# Altium PCB 23cm_amplifier_pcb.PcbDoc
Units mm, origin at the board's own origin, x right, y up, seen from the top; angles counter-clockwise.
Board outline 50 x 50 mm, 4 copper layers (Top Layer, GND, VCC, Bottom Layer), stack 1.071 mm thick; 20 components, 10 nets, 64 pads, 352 vias.
Unrouted connection lines stored in the file: 39.
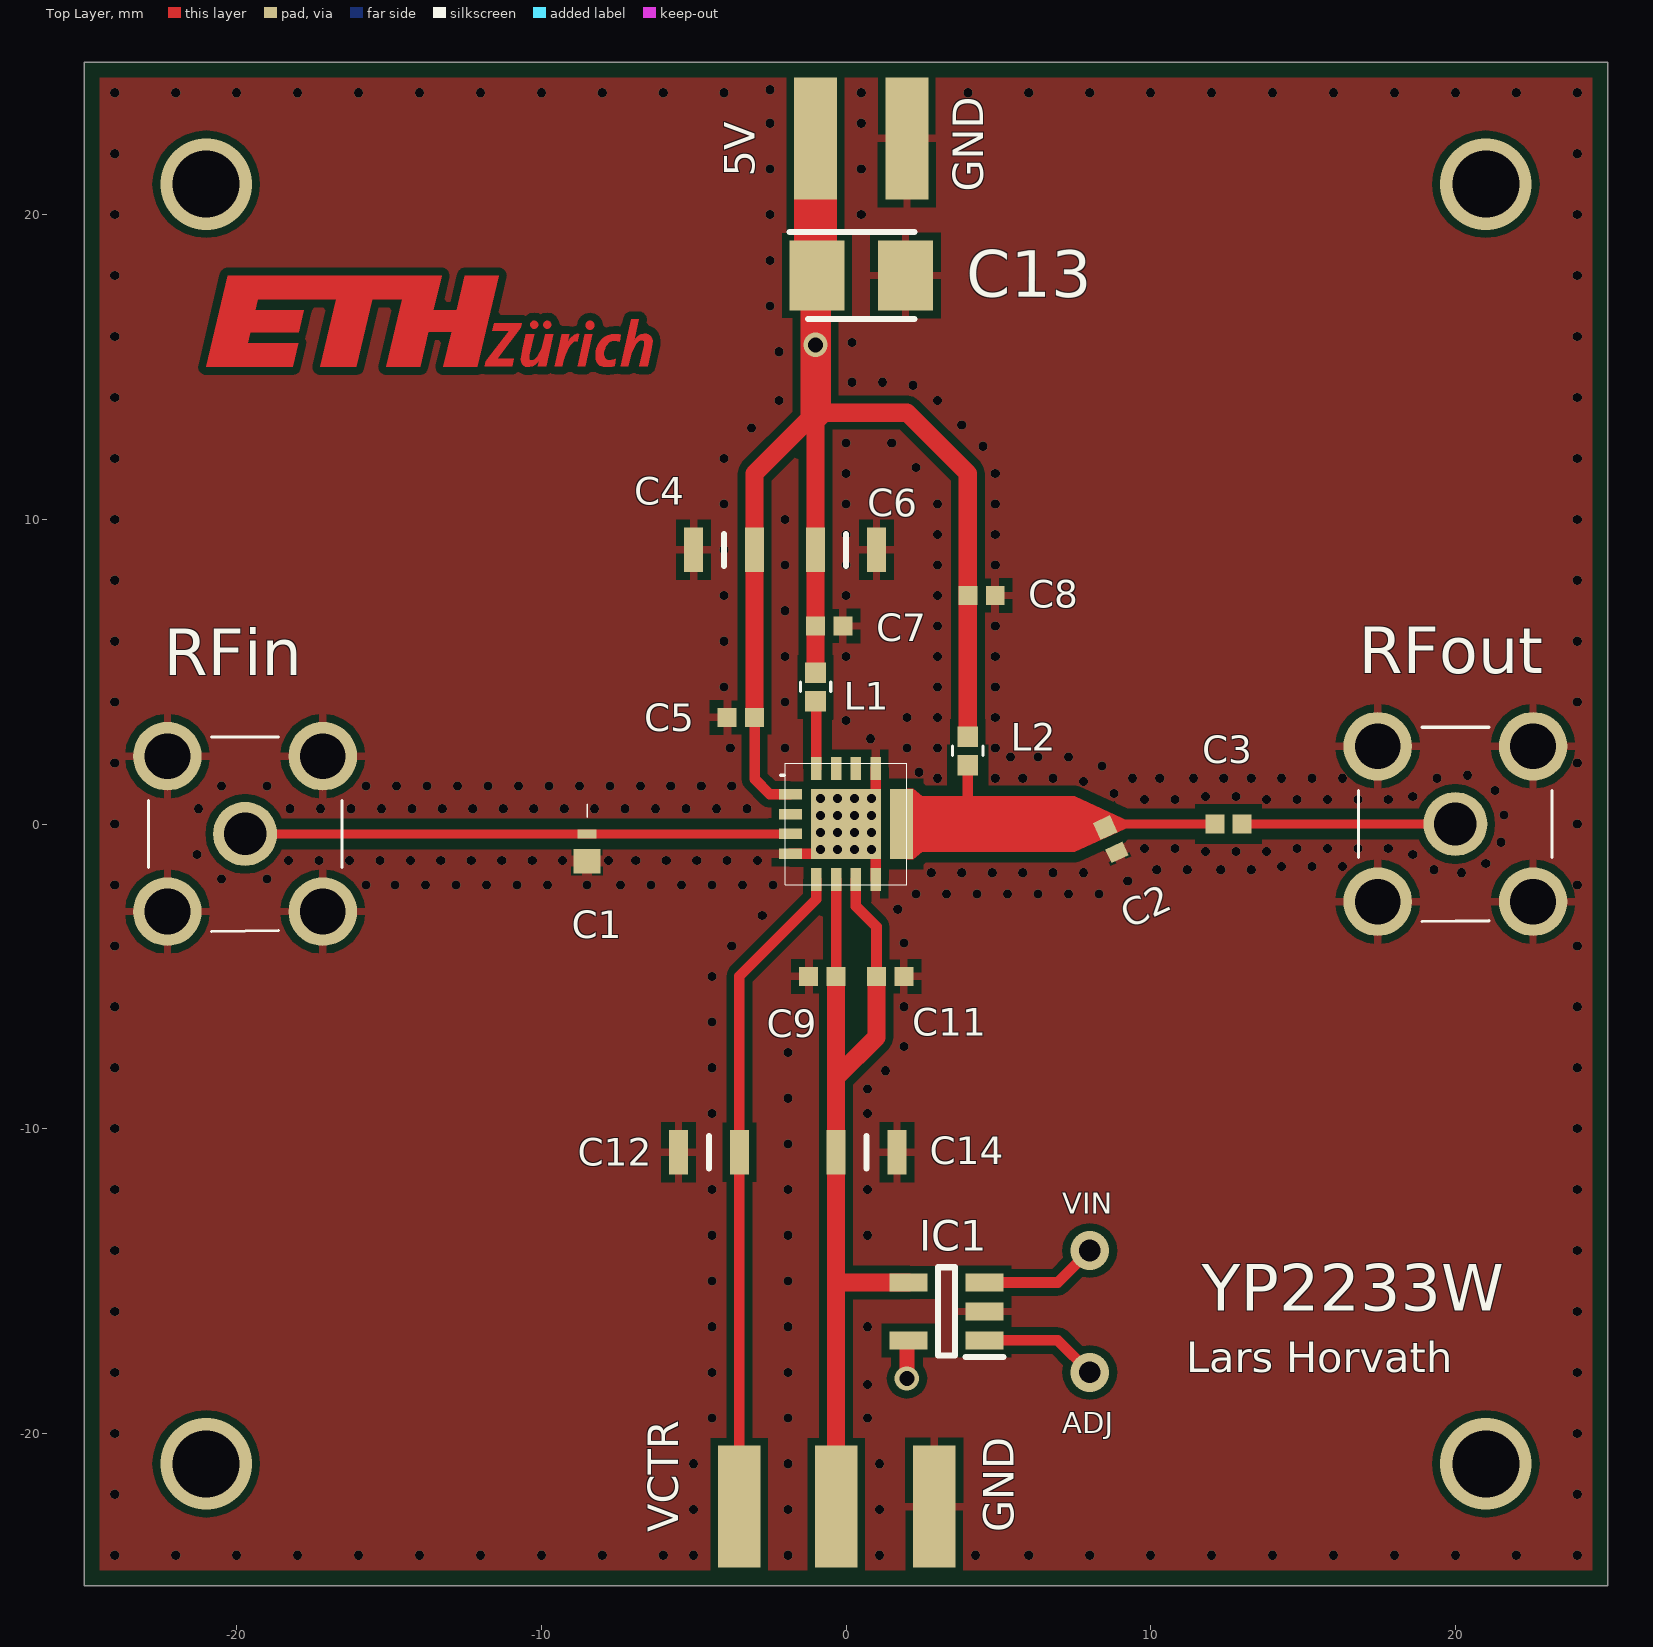
[diagram p0: Top Layer view]
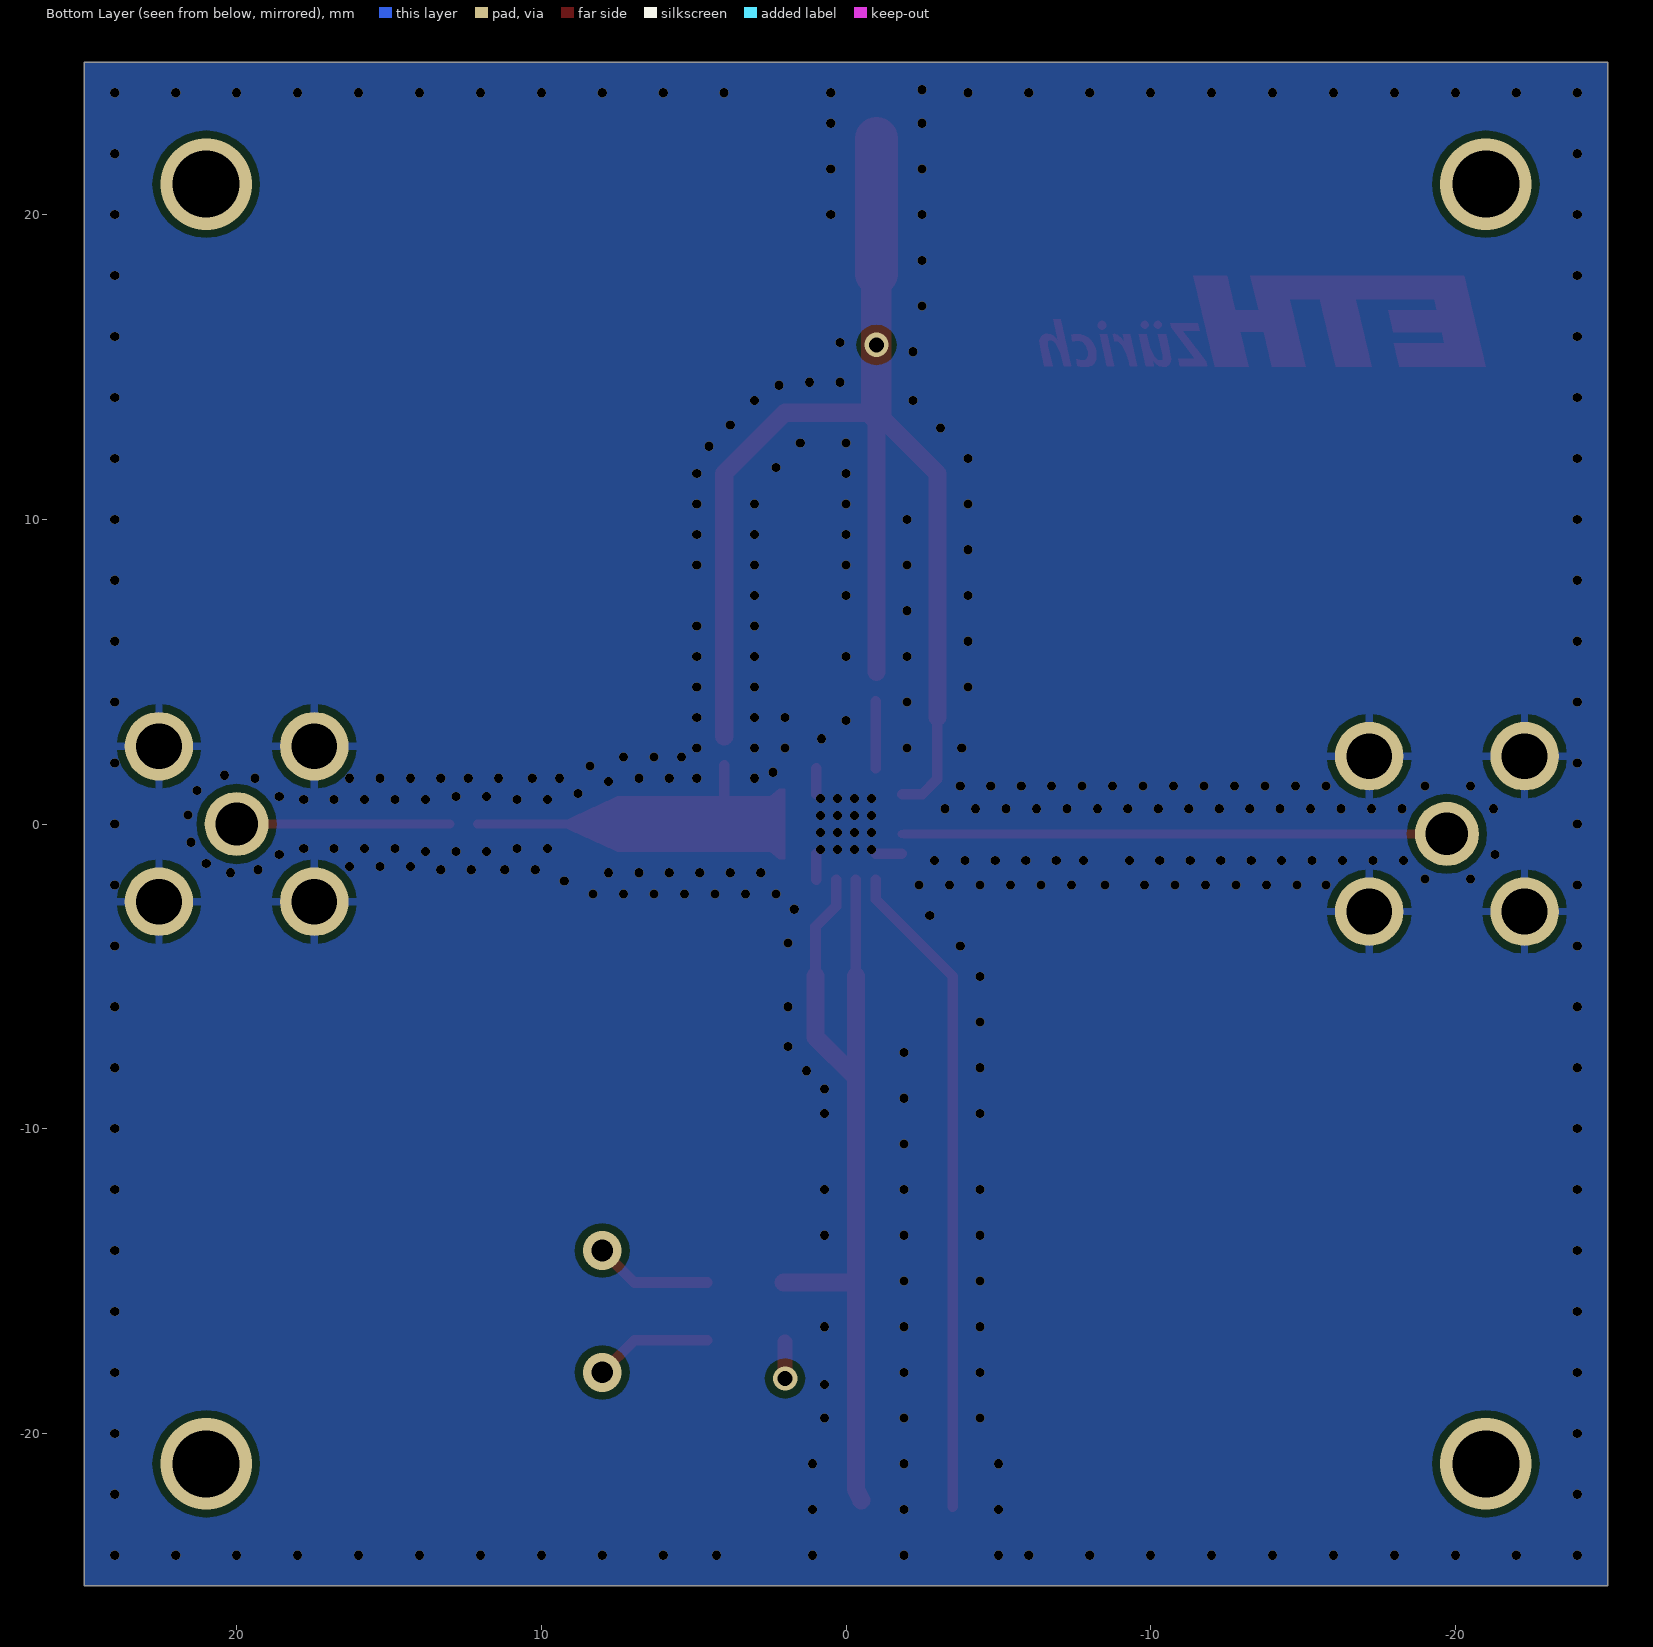
[diagram p1: Bottom Layer view, seen from below]
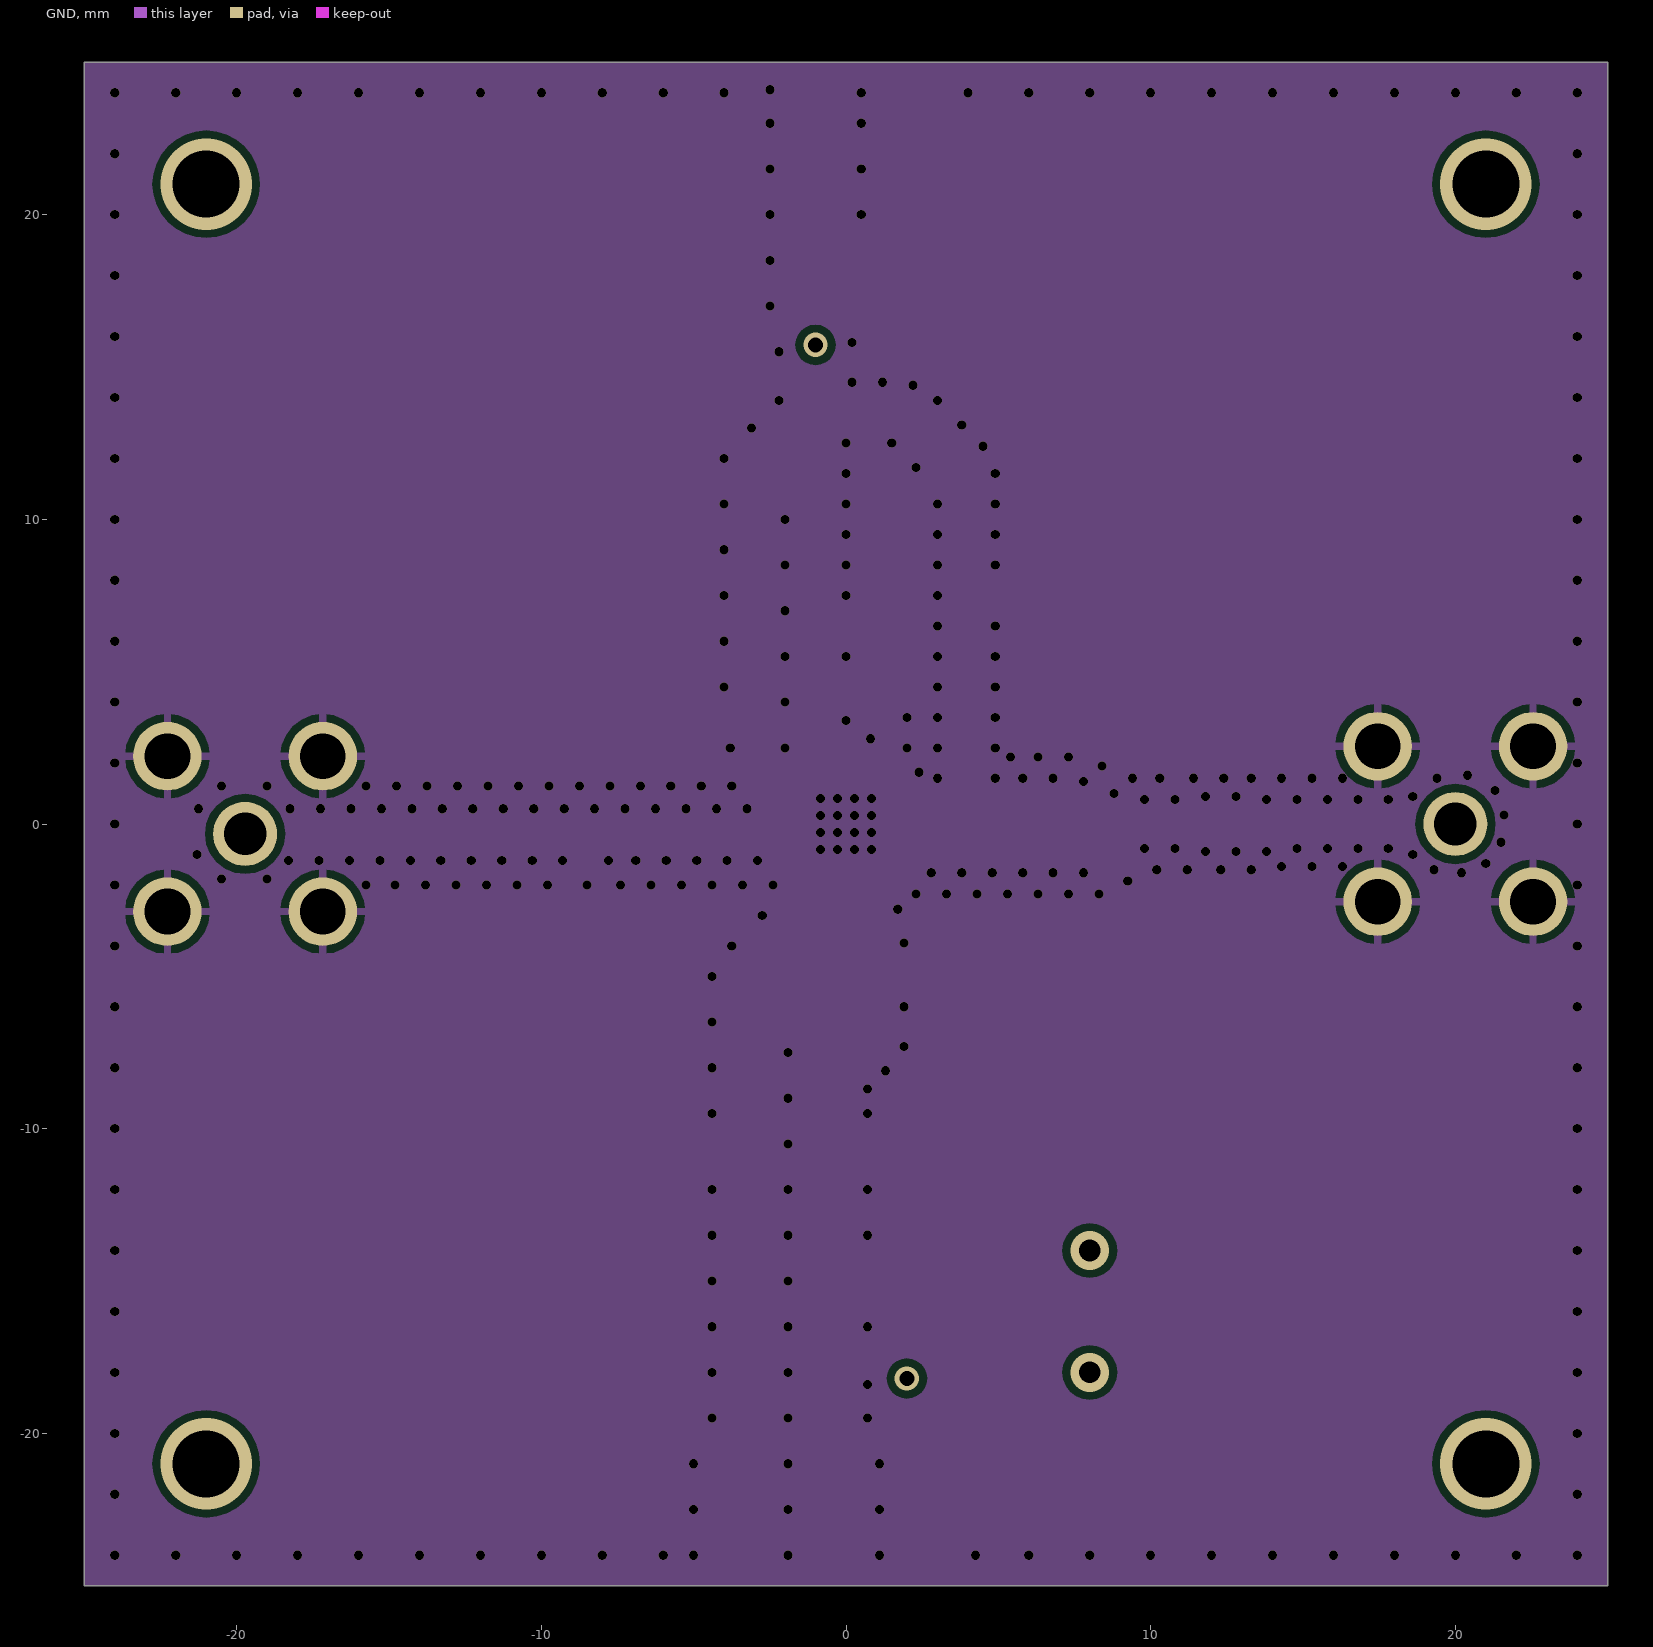
[diagram p2: GND]
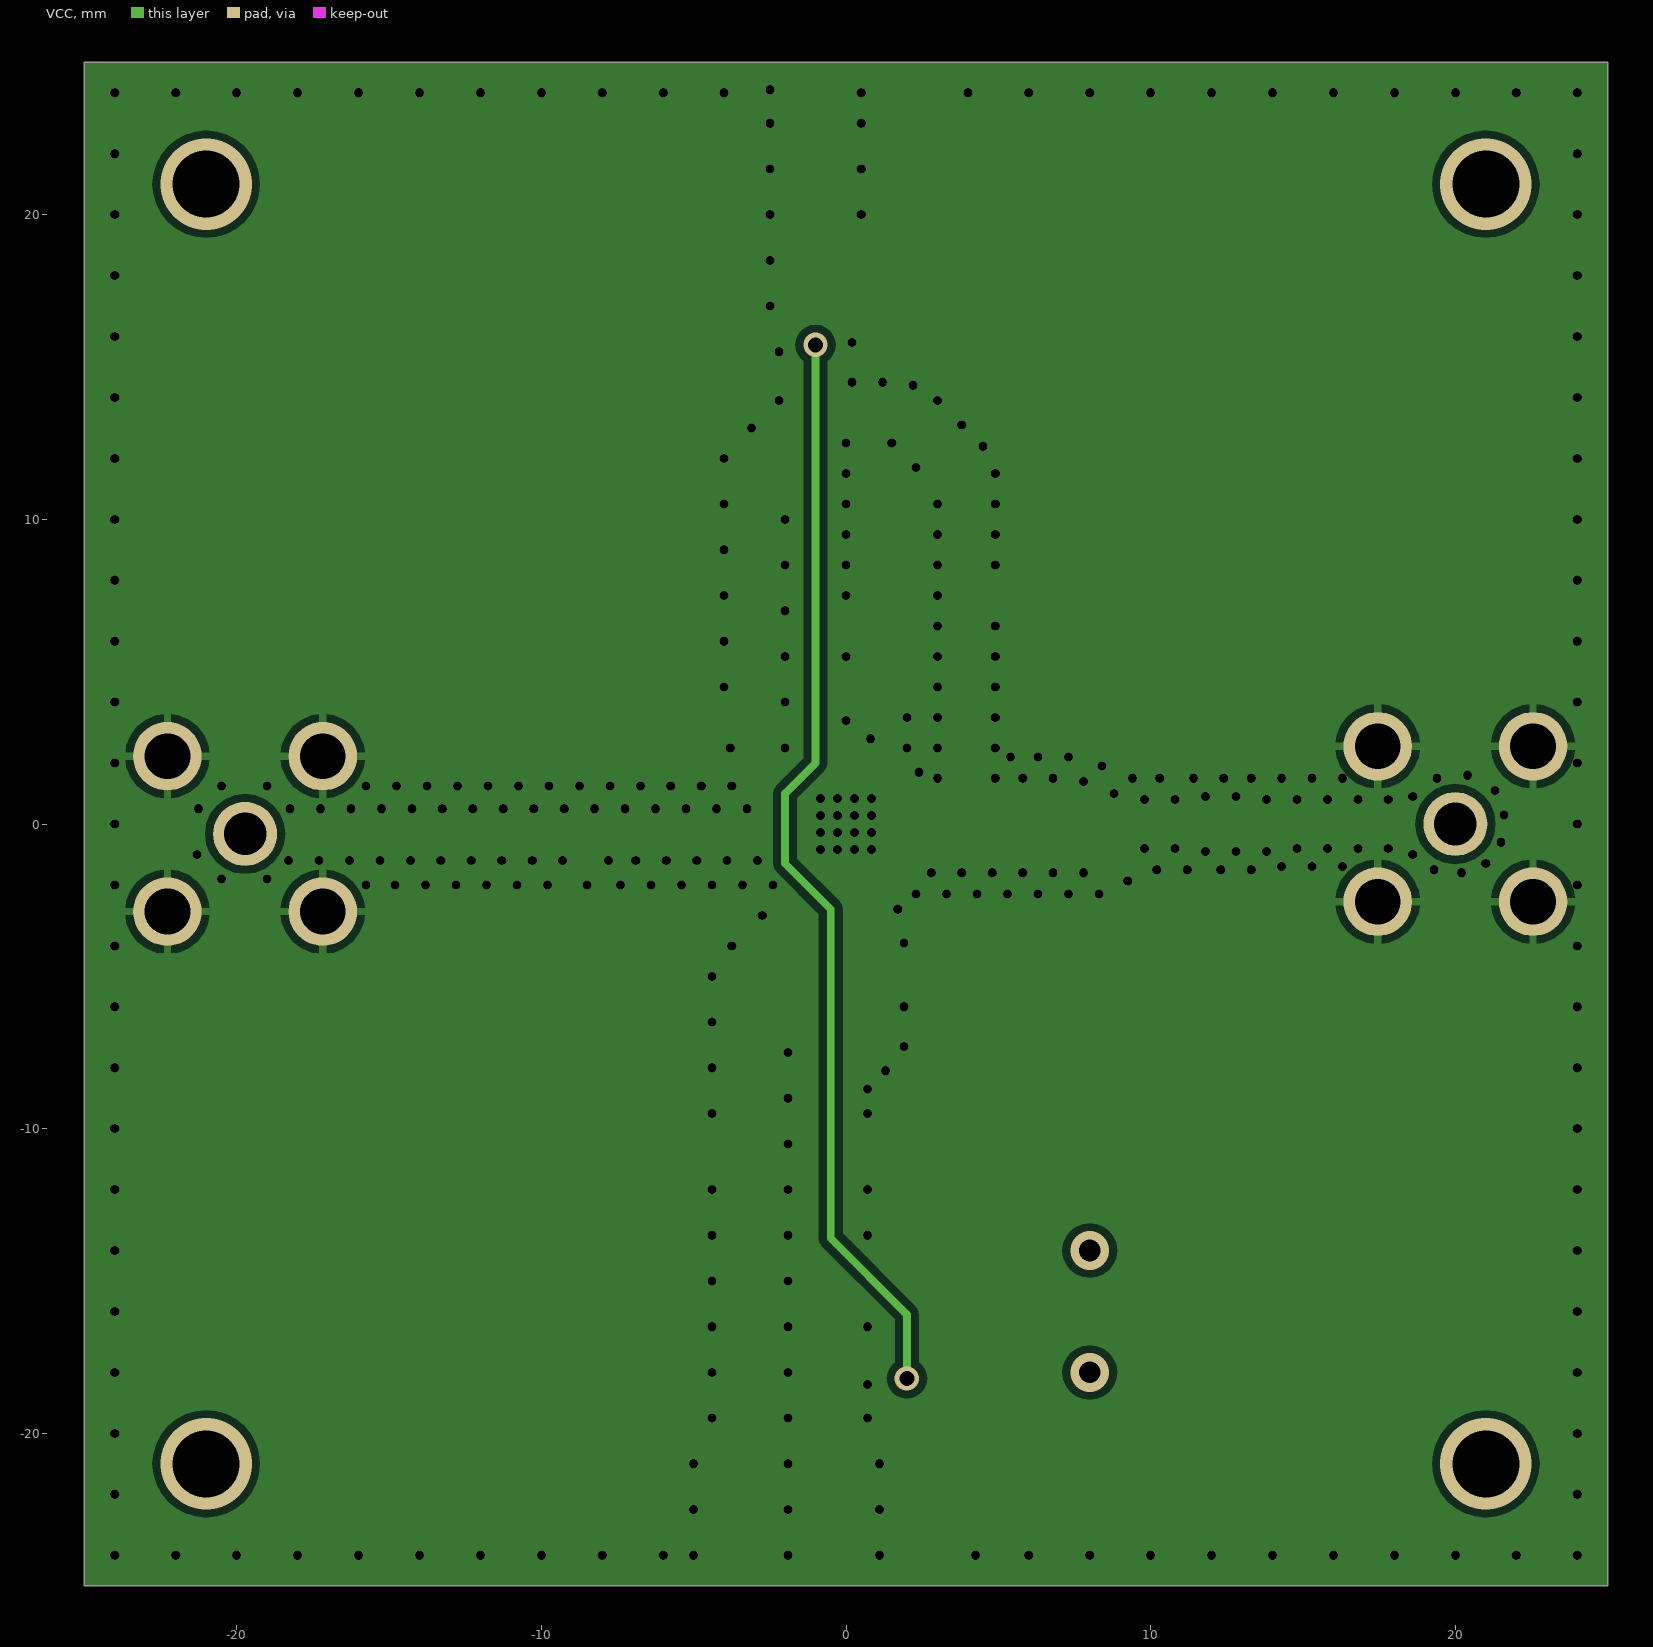
[diagram p3: VCC]

## Layer stack, top to bottom
Top Solder: solder mask 0.0102, Solder Resist, Dk 3.5
Top Layer: signal copper 0.0356
Dielectric 2: prepreg 0.2, FR-4, Dk 4.5
GND: signal copper 0.035
Dielectric 1: dielectric 0.53, FR-4, Dk 4.5
VCC: signal copper 0.035
Dielectric 3: prepreg 0.2, FR-4, Dk 4.5
Bottom Layer: signal copper 0.0356
Bottom Solder: solder mask 0.0102, Solder Resist, Dk 3.5

## Board outline
-25,-25 25,-25 25,25 -25,25

## Design rules (kind name [scope] priority, off if disabled: settings)
Clearance GND_1 [InNamedPolygon('Top Layer-GND 1') Or  InNamedPolygon('Top Layer-GND') vs InNetClass('RF Net')] p1: gap=0.254 ignorepadtopadclearanceinfootprint=TRUE except(0: Arc-Hole Track-Hole SMDPad-Hole THPad-Hole Via-Hole Fill-Hole Poly-Hole Region-Hole Text-Hole; 0.35: SMDPad-Poly Poly-Poly Poly-Region; 0.36: Track-Poly)
Clearance Clearance_1 [All] p2: gap=0.254 ignorepadtopadclearanceinfootprint=TRUE except(0: Arc-Hole Track-Hole SMDPad-SMDPad SMDPad-Via SMDPad-Hole THPad-Hole Via-Hole Fill-Hole Poly-Hole Region-Hole Text-Hole)
HoleSize [All] p1: absolutevalues=TRUE maxlimit=4 minlimit=0.2 maxpercent=80.000 minpercent=20.000
PlaneClearance PlaneClearance_1 [All] p1: clearance=0.508
PlaneClearance PlaneClearance_RF [InNetClass('RF Net')] p2: clearance=2
PolygonConnect "RF Caps" [InComponent('C1') Or InComponent('C2') vs IsNamedPolygon('Top Layer-GND') Or IsNamedPolygon('Top Layer-GND 1')] p1: thpad.connectstyle=Relief thpad.reliefconductorwidth=0.254 thpad.reliefentries=4 thpad.polygonreliefangle="90 Angle" thpad.airgapwidth=0.254 smdpad.connectstyle=Relief smdpad.reliefconductorwidth=0.35 smdpad.reliefentries=4 smdpad.polygonreliefangle="90 Angle" smdpad.airgapwidth=0.06 via.connectstyle=Relief via.reliefconductorwidth=0.254 via.reliefentries=4 via.polygonreliefangle="90 Angle" via.airgapwidth=0.254
PolygonConnect PolygonConnect_1 [All vs IsNamedPolygon('Top Layer-GND') or IsNamedPolygon('Bottom Layer-GND') or IsNamedPolygon('GND-GND') or IsNamedPolygon('VCC-GND')] p2: thpad.connectstyle=Relief thpad.reliefconductorwidth=0.254 thpad.reliefentries=4 thpad.polygonreliefangle="90 Angle" thpad.airgapwidth=0.254 smdpad.connectstyle=Relief smdpad.reliefconductorwidth=0.254 smdpad.reliefentries=4 smdpad.polygonreliefangle="90 Angle" smdpad.airgapwidth=0.254 via.connectstyle=Direct via.reliefconductorwidth=0.254 via.reliefentries=4 via.polygonreliefangle="90 Angle" via.airgapwidth=0.254
PolygonConnect Shielding [All vs IsNamedPolygon('Top Layer-GND 1')] p3: thpad.connectstyle=Relief thpad.reliefconductorwidth=0.254 thpad.reliefentries=4 thpad.polygonreliefangle="90 Angle" thpad.airgapwidth=0.254 smdpad.connectstyle=Relief smdpad.reliefconductorwidth=0.254 smdpad.reliefentries=4 smdpad.polygonreliefangle="90 Angle" smdpad.airgapwidth=0.254 via.connectstyle=Direct via.reliefconductorwidth=0.254 via.reliefentries=4 via.polygonreliefangle="90 Angle" via.airgapwidth=0.254
PolygonConnect [All] p4: connectstyle=Relief reliefconductorwidth=0.254 reliefentries=4 polygonreliefangle="90 Angle" airgapwidth=0.254
RoutingVias [All] p1: holewidth=0.3 width=0.55 viastyle="Through Hole" minholewidth=0.2 minwidth=0.45 maxholewidth=4 maxwidth=5
ShortCircuit [All] p1: allowed=TRUE
SolderMaskExpansion [All] p1: expansion=0.102
Width [All] p1: maxlimit=2 minlimit=0.1 preferedwidth=0.35 midlayer1_minwidth=0.254 midlayer1_maxwidth=0.254 midlayer2_minwidth=0.254 midlayer2_maxwidth=0.254 minimp=50.000000 maximp=50.000000 favimp=50.000000
27 further rules are at their usual default settings.

## Classes and differential pairs
net class "RF Net": NetC3_2 RF_IN RF_OUT

## Components (designator, comment, footprint, x,y, rotation, side; value= is the part's Value field where it differs from the comment)
A1 "Logo ETH Zurich" eth-zurich_3mm -21,15 r0 top
C1 "04023J3R0ABSTR" CAPC0402(1005)70_N#1 -8.5,-0.775 r90 top value=3pF
C2 "0402YJ8R2BBSTR" CAPC0402(1005)70_N#2 8.7,-0.525 r115 top value=8.2pF
C3 "C1005C0G1H101J050BE" CAPC0402(1005)70_N#3 12.55,0 r0 top value=100pF
C4 "C2012X8L1A106K125AC" CAPC2012X145N -4,9 r0 top
C5 "C1005C0G1H101J050BE" CAPC0402(1005)70_N#4 -3.45,3.5 r0 top value=100pF
C6 "C2012X8L1A106K125AC" CAPC2012X145N 0,9 r180 top
C7 "C1005C0G1H101J050BE" CAPC0402(1005)70_N#4 -0.55,6.5 r180 top value=100pF
C8 "GRM155R60J106ME15J" CAPC0402(1005)70_N#4 4.45,7.5 r0 top value=10uF
C9 "C1005C0G1H101J050BE" CAPC0402(1005)70_N#4 -0.775,-5 r0 top value=100pF
C11 "C1005C0G1H101J050BE" CAPC0402(1005)70_N#4 1.45,-5 r0 top value=100pF
C12 "C2012X8L1A106K125AC" CAPC2012X145N -4.5,-10.775 r180 top
C13 "TCJB476M010R0070" CAPPM3528X210N 0.5,18 r0 top
C14 "C2012X8L1A106K125AC" CAPC2012X145N 0.675,-10.775 r0 top
IC1 "DS4305R+T&R" SOT95P280X145-5N 3.3,-16 r180 top
L1 "LQW15AN3N9B8ZD" INDC1005X07N -1,4.5 r90 top value=3.9nH
L2 "LQW15AN3N9B8ZD" INDC1005X07N 4,2.4 r90 top value=3.9nH
RFin "1-1478979-0" 114789790 -19.723,-0.338 r0 top (schematic designator J1)
RFout "1-1478979-0" 114789790 20,-0.013 r0 top (schematic designator J2)
YP2233W "amplifier" YP2233W 0,0 r0 top

## Footprints (in the part's own frame and the unit in brackets; to place one, negate y for a bottom-side part, rotate by r counter-clockwise, add the part's x,y. Pads: shape width x height; smd on the part's side, far side on the other; paste and mask are expansions set on the pad)
114789790 [mm]
  round 2.25 hole 1.5: 1(-2.55,2.563) 2(2.55,2.563) 3(2.55,-2.537) 4(-2.55,-2.537)
  round 2.1 hole 1.4: 5(0,0.013)
  silkscreen extent -3.17,-3.19 3.17,3.19, body extent -3.17,-3.17 3.18,3.17, height 10
CAPC0402(1005)70_N#1 [mm] "Chip Capacitor, Body 1.0x0.5mm, Height 0.7mm, IPC Medium Density"
  rect 0.8x0.9 smd: 1(-0.45,0)
  rect 0.293x0.62 smd: 2(0.45,0)
  body extent -0.55,-0.3 0.55,0.3, height 0.7
CAPC0402(1005)70_N#2 [mm] "Chip Capacitor, Body 1.0x0.5mm, Height 0.7mm, IPC Medium Density"
  rect 0.5x0.62 smd: 1(-0.45,0)
  rect 0.62x0.62 smd: 2(0.45,0)
  body extent -0.55,-0.3 0.55,0.3, height 0.7
CAPC0402(1005)70_N#3 [mm] "Chip Capacitor, Body 1.0x0.5mm, Height 0.7mm, IPC Medium Density"
  rect 0.62x0.62 smd: 1(-0.44,0) 2(0.45,0)
  body extent -0.55,-0.3 0.55,0.3, height 0.7
CAPC0402(1005)70_N#4 [mm] "Chip Capacitor, Body 1.0x0.5mm, Height 0.7mm, IPC Medium Density"
  rect 0.62x0.62 smd: 1(-0.45,0) 2(0.45,0)
  body extent -0.55,-0.3 0.55,0.3, height 0.7
CAPC2012X145N [mm]
  rect 0.62x1.47 smd: 1(-1,0) 2(1,0)
  silkscreen extent 0,-0.53 0,0.53, body extent -1,-0.63 1,0.63, height 1.45
CAPPM3528X210N [mm]
  rect 1.8x2.3 smd: 1(-1.45,0) 2(1.45,0)
  silkscreen extent -2.35,-1.43 1.75,1.43, body extent -1.75,-1.43 1.75,1.43, height 2.1
eth-zurich_3mm [mm] "Logo ETH Zurich"
  Top Layer circle w0.27: c10.764,1.389 r0.001
  Top Layer circle w0.27: c11.193,1.389 r0.001
  Top Layer circle w0.3: c12.598,1.372 r0.001
  Top Layer region: 8.895,0 8.895,0 9.6,3 8.493,3 8.227,1.87 7.459,1.87 7.723,3 0.705,3 0,0 1.171,0 2.838,0 3.021,0.78 1.356,0.78 1.442,1.146 3.034,1.146 3.204,1.866 1.609,1.866 1.693,2.22 4.273,2.22 3.75,0 4.923,0 5.445,2.22 6.433,2.22 5.913,0 7.02,0 7.29,1.151 8.058,1.151 7.788,0
  Top Layer region: 10.359,1.44 10.359,1.44 9.452,1.44 9.396,1.191 9.945,1.191 9.172,0.185 9.138,0.024 10.044,0.024 10.099,0.273 9.549,0.273 10.325,1.284
  Top Layer region: 11.166,0.024 11.166,0.024 11.398,1.071 11.121,1.071 11.031,0.661 10.98,0.54 10.92,0.432 10.86,0.336 10.8,0.273 10.752,0.24 10.704,0.216 10.668,0.216 10.632,0.228 10.608,0.252 10.602,0.288 10.602,0.336 10.608,0.378 10.763,1.071 10.496,1.071 10.38,0.54 10.336,0.342 10.332,0.252 10.344,0.168 10.368,0.096 10.416,0.048 10.476,0.012 10.524,0 10.62,0 10.716,0.024 10.8,0.072 10.863,0.135 10.932,0.216 10.89,0.024
  Top Layer region: 11.857,0.78 11.857,0.78 11.922,1.071 11.676,1.071 11.444,0.024 11.689,0.024 11.727,0.193 11.784,0.378 11.85,0.54 11.904,0.642 11.979,0.741 12.03,0.792 12.072,0.822 12.114,0.84 12.144,0.84 12.184,0.83 12.24,1.08 12.204,1.086 12.168,1.086 12.132,1.08 12.078,1.056 12.042,1.032 11.994,0.99 11.952,0.948 11.904,0.876
  Top Layer region: 12.438,0.024 12.438,0.024 12.671,1.071 12.424,1.071 12.192,0.024
  Top Layer region: 13.614,1.051 13.614,1.051 13.56,1.071 13.5,1.08 13.404,1.08 13.296,1.071 13.182,1.044 13.086,0.996 13.008,0.936 12.96,0.888 12.912,0.828 12.87,0.756 12.84,0.684 12.81,0.6 12.792,0.522 12.78,0.444 12.78,0.342 12.792,0.252 12.81,0.192 12.84,0.132 12.876,0.084 12.924,0.048 12.978,0.024 13.032,0.012 13.152,0 13.212,0 13.32,0.012 13.387,0.028 13.416,0.036 13.441,0.272 13.386,0.252 13.308,0.234 13.248,0.228 13.206,0.228 13.158,0.24 13.116,0.264 13.092,0.288 13.074,0.324 13.062,0.366 13.056,0.408 13.056,0.462 13.068,0.54 13.092,0.618 13.122,0.684 13.158,0.738 13.212,0.804 13.26,0.834 13.308,0.852 13.356,0.858 13.428,0.858 13.494,0.852 13.524,0.846 13.566,0.834
  Top Layer region: 14.118,0.96 14.118,0.96 14.049,0.879 14.2,1.562 13.955,1.562 13.614,0.024 13.86,0.024 13.95,0.433 14.001,0.555 14.061,0.663 14.121,0.759 14.181,0.822 14.229,0.855 14.277,0.879 14.313,0.879 14.349,0.867 14.373,0.843 14.379,0.807 14.379,0.759 14.373,0.717 14.219,0.024 14.486,0.024 14.601,0.555 14.644,0.753 14.649,0.843 14.637,0.927 14.613,0.999 14.565,1.047 14.505,1.083 14.457,1.095 14.361,1.095 14.265,1.071 14.181,1.023
INDC1005X07N [mm] "Chip Inductor, 2-Leads, Body 1.00x0.50mm, IPC Medium Density"
  rect 0.67x0.68 smd: 1(-0.47,0) 2(0.47,0)
  silkscreen extent -0.15,-0.5 0.15,0.5, body extent -0.58,-0.33 0.58,0.32, height 0.65
SOT95P280X145-5N [mm]
  rect 1.25x0.6 smd: 1(-1.25,0.95) 2(-1.25,0) 3(-1.25,-0.95) 4(1.25,-0.95) 5(1.25,0.95)
  silkscreen extent -1.88,-1.45 0.28,1.5, body extent -1.4,-1.45 1.4,1.45, height 1.45
YP2233W [mm] "YP2233W amplifier"
  rect 0.75x0.35 smd: 1(-1.825,0.975) 2(-1.825,0.325) 3(-1.825,-0.325) 4(-1.825,-0.975)
  rect 0.35x0.75 smd: 5(-0.975,-1.825) 6(-0.325,-1.825) 7(0.325,-1.825) 8(0.975,-1.825) 13(0.975,1.825) 14(0.325,1.825) 15(-0.325,1.825) 16(-0.975,1.825)
  rect 0.75x2.3 smd: 9(1.825,0)
  rect 2.3x2.3 smd: 17(0,0)
  Top Layer lines w0.35: -1.825,-0.975 -0.975,-0.975 ; 0.975,-1.825 0.975,-0.975 ; 0.975,0.975 0.975,1.825
  silkscreen extent -2.15,-2 2,2, body extent -2,-2 2,2, height 0.75

## Part data
A1: library part CMP-00038-1
C1: library part CMP-00674-1, "Silizium-HF-Kondensatoren / Dünnfilm 25V 3pF .05pFTol ThinFilm 0402", Capacitance=3pF, Case/Package=0402, Case Code (Metric)=1005, Dielectric=C0G(NP0), Manufacturer=Murata, Max Operating Temperature=125°C, Min Operating Temperature=-55°C, Tolerance=5%, Voltage Rating (DC)=25V, Case Code (Imperial)=0402, ComponentLink1Description=Mouser, ComponentLink1URL=https://www.mouser.ch/ProductDetail/581-04023J3R0ABSTR, Depth=0.5mm, Height=0.5mm, Lead Free="Lead Free", Length=1mm, Manufacturer Part Number=04023J3R0ABSTR, Mount="Surface Mount", Termination=SMD/SMT, Thickness=0.022inch, Width=0.02inch
C2: library part CMP-00674-1, "Silizium-HF-Kondensatoren / Dünnfilm 16V 8.2pF .1pFTol ThinFilm 0402 / RoHS-konform", Capacitance=8.2pF, Case/Package=0402, Case Code (Metric)=1005, Dielectric=C0G(NP0), Manufacturer=Murata, Manufacturer Part Number=GRM1555C1E560JA01D, Max Operating Temperature=125°C, Min Operating Temperature=-55°C, Tolerance=5%, Voltage Rating (DC)=25V, Case Code (Imperial)=0402, ComponentLink1Description=Mouser, ComponentLink1URL=https://www.mouser.ch/ProductDetail/581-0402YJ8R2BBSTR, Depth=0.5mm, Height=0.5mm, Lead Free="Lead Free", Length=1mm, Mount="Surface Mount", Termination=SMD/SMT, Thickness=0.022inch, Width=0.02inch
C3 C5 C7 C9 C11: library part CMP-00674-1, "Kondensator aus mehreren Keramikschichten MLCC - SMD/SMT SOFT 0402 50V 100pF C0G 5% T: 0.5mm / RoHS-konform", Capacitance=100pF, Case/Package=0402, Case Code (Metric)=1005, Dielectric=C0G(NP0), Manufacturer=TDK, Max Operating Temperature=125°C, Min Operating Temperature=-55°C, Tolerance=5%, Voltage Rating (DC)=25V, Case Code (Imperial)=0402, ComponentLink1Description=Mouser, ComponentLink1URL=https://www.mouser.ch/ProductDetail/810-C1005C0G1H101JBE, Depth=0.5mm, Height=0.5mm, Lead Free="Lead Free", Length=1mm, Manufacturer Part Number=C1005C0G1H101J050BE, Mount="Surface Mount", Termination=SMD/SMT, Thickness=0.022inch, Width=0.02inch
C4 C6 C12 C14: "Kondensator aus mehreren Keramikschichten MLCC - SMD/SMT 0805 10VDC 10uF 10% X8L", Capacity=10uF, Manufacturer_Name=TDK, Mouser Part Number=810-C2012X8L106K125C, ComponentLink1Description=Mouser, ComponentLink1URL=https://www.mouser.ch/ProductDetail/810-C2012X8L106K125C, Datasheet Link=https://product.tdk.com/info/en/catalog/datasheets/mlcc_commercial_midvoltage_en.pdf, Height=1.45mm, Manufacturer_Part_Number=C2012X8L1A106K125AC, Mouser Price/Stock=https://www.mouser.co.uk/ProductDetail/TDK/C2012X8L1A106K125AC?qs=P1JMDcb91o46CKBinU4Lfg%3D%3D
C8: library part CMP-00674-1, "Kondensator aus mehreren Keramikschichten MLCC - SMD/SMT 10UF 6.3V 20% 0402 / RoHS-konform", Capacitance=10uF, Case/Package=0402, Case Code (Metric)=1005, Dielectric=C0G(NP0), Manufacturer=Murata, Max Operating Temperature=125°C, Min Operating Temperature=-55°C, Tolerance=5%, Voltage Rating (DC)=25V, Case Code (Imperial)=0402, ComponentLink1Description=Mouser, ComponentLink1URL=https://www.mouser.ch/ProductDetail/81-GRM155R60J106ME5J, Depth=0.5mm, Height=0.5mm, Lead Free="Lead Free", Length=1mm, Manufacturer Part Number=GRM155R60J106ME15J, Mount="Surface Mount", Termination=SMD/SMT, Thickness=0.022inch, Width=0.02inch
C13: "Tantalum Capacitors - Polymer 10V 47uF 20% 1210 ESR=70mOhm", Manufacturer_Name=AVX, Mouser Part Number=581-TCJB476M10R70, Arrow Part Number=TCJB476M010R0070, Arrow Price/Stock=https://www.arrow.com/en/products/tcjb476m010r0070/avx, ComponentLink1Description=Mouser, ComponentLink1URL=https://www.mouser.ch/ProductDetail/581-TCJB476M10R70, Datasheet Link=http://datasheets.avx.com/TCJ.pdf, Height=2.1mm, Manufacturer_Part_Number=TCJB476M010R0070, Mouser Price/Stock=https://www.mouser.com/Search/Refine.aspx?Keyword=581-TCJB476M10R70
IC1: "Programmable Reference Voltage for 2.65V", Manufacturer_Name="Maxim Integrated", Mouser Part Number=700-DS4305RT&R, ComponentLink1Description=Datasheet, ComponentLink1URL=https://www.mouser.ch/datasheet/2/256/DS4305-DS4305K-1514614.pdf, ComponentLink2Description=Mouser, ComponentLink2URL=https://www.mouser.ch/ProductDetail/Maxim-Integrated/DS4305R%2bTR?qs=GxOUx7aO6nxNFZIWlDSGaA%3D%3D, Datasheet Link=https://componentsearchengine.com/Datasheets/1/DS4305R+T&R.pdf, Height=1.45mm, Manufacturer_Part_Number=DS4305R+T&R, Mouser Price/Stock=https://www.mouser.co.uk/ProductDetail/Maxim-Integrated/DS4305R%2bTR?qs=GxOUx7aO6nxNFZIWlDSGaA%3D%3D
L1 L2: library part CMP-00986-1, "Festinduktivitäten 0402 3.9nH 1950mA 0.03ohms 10GHz", Case/Package=0402, Case Code (Metric)=1005, Current Rating=250mA, DC Resistance (DCR)=900mR, Inductance=3.9nH, Max Operating Temperature=125°C, Min Operating Temperature=-55°C, Self Resonant Frequency=1.6GHz, Test Frequency=10GHz, Tolerance=5%, Case Code (Imperial)=0402, ComponentLink1Description=Mouser, ComponentLink1URL=https://www.mouser.ch/ProductDetail/81-LQW15AN3N9B8ZD, Core Material=Ceramic, DC Current=250mA, Depth=0.55mm, Height=0.55mm, Length=0.039inch, Max DC Current=250mA, Military Standard=Not, Mount="Surface Mount", Packaging="Tape and Reel", Radiation Hardening=No, Shielding=Unshielded, Width=0.02inch
RFin: "RF IN", Manufacturer_Name="TE Connectivity", Mouser Part Number=571-1-1478979-0, Arrow Part Number=1-1478979-0, Arrow Price/Stock=https://www.arrow.com/en/products/1-1478979-0/te-connectivity, Datasheet Link=http://www.te.com/commerce/DocumentDelivery/DDEController?Action=showdoc&DocId=Customer+Drawing%7F1478979%7FB%7Fpdf%7FEnglish%7FENG_CD_1478979_B.pdf%7F1-1478979-0, Height=10mm, Manufacturer_Part_Number=1-1478979-0, Mouser Price/Stock=https://www.mouser.co.uk/ProductDetail/TE-Connectivity/1-1478979-0?qs=Vcr9%2FL0R50jLfIYfi0kfuw%3D%3D
RFout: "RF OUT", Manufacturer_Name="TE Connectivity", Mouser Part Number=571-1-1478979-0, Arrow Part Number=1-1478979-0, Arrow Price/Stock=https://www.arrow.com/en/products/1-1478979-0/te-connectivity, Datasheet Link=http://www.te.com/commerce/DocumentDelivery/DDEController?Action=showdoc&DocId=Customer+Drawing%7F1478979%7FB%7Fpdf%7FEnglish%7FENG_CD_1478979_B.pdf%7F1-1478979-0, Height=10mm, Manufacturer_Part_Number=1-1478979-0, Mouser Price/Stock=https://www.mouser.co.uk/ProductDetail/TE-Connectivity/1-1478979-0?qs=Vcr9%2FL0R50jLfIYfi0kfuw%3D%3D
YP2233W: library part YP2233W, ComponentLink1Description=Datasheet, ComponentLink1URL=http://pro366bdc.pic21.websiteonline.cn/upload/innotionyp2233wdatasheet_8gzy.pdf

## Free pads (board coordinates)
  rect 1.4x4 smd: 21(-3.5,-22.4) 21(-1,22.5) 21(-0.325,-22.4) 21(2,22.5) 21(2.9,-22.4)

## Via types
v1: diameter 0.3, hole 0.3, Top Layer to Bottom Layer, tented both sides, 344 vias
v2: diameter 3, hole 2.2, Top Layer to Bottom Layer, 4 vias
v3: diameter 1.27, hole 0.711, Top Layer to Bottom Layer, tented bottom, 2 vias
v4: diameter 0.8, hole 0.5, Top Layer to Bottom Layer, tented both sides, 2 vias

## Nets (pads, with @x,y where several pads share a name; then routed paths per layer and width w, separated by ;. In a path a pad name is that pad's centre, name@x,y a point inside that pad or via, vN(x,y) a via of type N, cw(c..) or ccw(c..) an arc to the next point about the centre after c; other vN are vias at no path point)
5V: C4.2 C5.2 C6.2 C7.2 C8.1 C13.1 IC1.5 L1.2 L2.2 pad.21@-1,22.5 YP2233W.1 | length 83.5
  Top Layer w0.3: C13.1@-1,17.95 C13.1 C13.1@-1,18.05
  Top Layer w0.35: C5.2 -3,1.475 -2.5,0.975 YP2233W.1@-1.85,0.975 ; IC1.5@2,-17 IC1.5
  Top Layer w0.5: v4(2,-18.2) IC1.5@2,-17
  Top Layer w0.6: C5.2 C4.2 -3,11.5 -1,13.5 ; L1.2@-1,5 C7.2 C6.2 -1,13.5 ; L2.2 C8.1 4,11.5 2,13.5 -1,13.5
  Top Layer w1: -1,13.5 v4(-1,15.725) C13.1@-1,17.95
  Top Layer w1.4: C13.1@-1,18.05 pad.21@-1,22.5
  VCC w0.254: v4(-1,15.725) -1,2 -2,1 -2,-1.3 -0.5,-2.8 -0.5,-13.6 2,-16.1 v4(2,-18.2)
ADJ: IC1.1 | length 3.9
  Top Layer w0.35: IC1.1 6.95,-16.95 v3(8,-18)
GND: C1.1 C2.1 C4.1 C5.1 C6.1 C7.1 C8.2 C9.1 C11.2 C12.2 C13.2 C14.2 IC1.2 pad.21@2,22.5 pad.21@2.9,-22.4 RFin.1 RFin.2 RFin.3 RFin.4 RFout.1 RFout.2 RFout.3 RFout.4 YP2233W.4 YP2233W.8 YP2233W.13
  other v1: -24,-24 -22,-24 -20,-24 -18,-24 -16,-24 -14,-24 -12,-24 -10,-24 -8,-24 -6,-24 -5,-24 -1.9,-24 1.1,-24 4.25,-24 6,-24 8,-24 10,-24 12,-24 14,-24 16,-24 18,-24 20,-24 22,-24 24,-24 -5,-22.5 -1.9,-22.5 1.1,-22.5 -24,-22 24,-22 -5,-21 -1.9,-21 1.1,-21 -24,-20 24,-20 -4.4,-19.5 -1.9,-19.5 0.7,-19.5 0.7,-18.4 -24,-18 -4.4,-18 -1.9,-18 24,-18 -4.4,-16.5 -1.9,-16.5 0.7,-16.5 -24,-16 24,-16 -4.4,-15 -1.9,-15 -24,-14 24,-14 -4.4,-13.5 -1.9,-13.5 0.7,-13.5 -24,-12 -4.4,-12 -1.9,-12 0.7,-12 24,-12 -1.9,-10.5 -24,-10 24,-10 -4.4,-9.5 0.7,-9.5 -1.9,-9 0.7,-8.7 1.3,-8.1 -24,-8 -4.4,-8 24,-8 -1.9,-7.5 1.9,-7.3 -4.4,-6.5 -24,-6 1.9,-6 24,-6 -4.4,-5 -24,-4 -3.75,-4 24,-4 1.9,-3.9 -2.75,-3 1.7,-2.8 2.3,-2.3 3.3,-2.3 4.3,-2.3 5.3,-2.3 6.3,-2.3 7.3,-2.3 8.3,-2.3 -24,-2 -15.75,-2 -14.8,-2 -13.8,-2 -12.8,-2 -11.8,-2 -10.8,-2 -9.8,-2 -8.5,-2 -7.4,-2 -6.4,-2 -5.4,-2 -4.4,-2 -3.4,-2 -2.4,-2 24,-2 9.25,-1.875 -20.5,-1.8 -19,-1.8 2.8,-1.6 3.8,-1.6 4.8,-1.6 5.8,-1.6 6.8,-1.6 7.8,-1.6 20.2,-1.6 10.2,-1.5 11.2,-1.5 12.3,-1.5 13.3,-1.5 19.3,-1.5 14.3,-1.4 15.3,-1.4 16.3,-1.4 21,-1.3 -18.3,-1.2 -17.3,-1.2 -16.3,-1.2 -15.3,-1.2 -14.3,-1.2 -13.3,-1.2 -12.3,-1.2 -11.3,-1.2 -10.3,-1.2 -9.3,-1.2 -7.8,-1.2 -6.9,-1.2 -5.9,-1.2 -4.9,-1.2 -3.9,-1.2 -2.9,-1.2 -21.3,-1 18.6,-1 11.8,-0.9 12.8,-0.9 13.8,-0.9 -0.84,-0.84 -0.28,-0.84 0.28,-0.84 0.84,-0.84 9.8,-0.8 10.8,-0.8 14.8,-0.8 15.8,-0.8 16.8,-0.8 17.8,-0.8 21.5,-0.6 -0.84,-0.28 -0.28,-0.28 0.28,-0.28 0.84,-0.28 -24,0 24,0 -0.84,0.28 -0.28,0.28 0.28,0.28 0.84,0.28 21.6,0.3 -21.25,0.5 -18.25,0.5 -17.25,0.5 -16.25,0.5 -15.25,0.5 -14.25,0.5 -13.25,0.5 -12.25,0.5 -11.25,0.5 -10.25,0.5 -9.25,0.5 -8.25,0.5 -7.25,0.5 -6.25,0.5 -5.25,0.5 -4.25,0.5 -3.25,0.5 9.8,0.8 10.8,0.8 13.8,0.8 14.8,0.8 15.8,0.8 16.8,0.8 17.8,0.8 -0.84,0.84 -0.28,0.84 0.28,0.84 0.84,0.84 11.8,0.9 12.8,0.9 18.6,0.9 8.8,1 21.3,1.1 -20.5,1.25 -19,1.25 -15.75,1.25 -14.75,1.25 -13.75,1.25 -12.75,1.25 -11.75,1.25 -10.75,1.25 -9.75,1.25 -8.75,1.25 -7.75,1.25 -6.75,1.25 -5.75,1.25 -4.75,1.25 -3.75,1.25 7.8,1.4 3,1.5 4.9,1.5 5.8,1.5 6.8,1.5 9.4,1.5 10.3,1.5 11.4,1.5 12.4,1.5 13.3,1.5 14.3,1.5 15.3,1.5 16.3,1.5 19.4,1.5 20.4,1.6 2.4,1.7 8.4,1.9 -24,2 24,2 5.4,2.2 6.3,2.2 7.3,2.2 -3.8,2.5 -2,2.5 2,2.5 3,2.5 4.9,2.5 0.8,2.8 0,3.4 2,3.5 3,3.5 4.9,3.5 -24,4 -2,4 24,4 -4,4.5 3,4.5 4.9,4.5 -2,5.5 0,5.5 3,5.5 4.9,5.5 -24,6 -4,6 24,6 3,6.5 4.9,6.5 -2,7 -4,7.5 0,7.5 3,7.5 -24,8 24,8 -2,8.5 0,8.5 3,8.5 4.9,8.5 -4,9 0,9.5 3,9.5 4.9,9.5 -24,10 -2,10 24,10 -4,10.5 0,10.5 3,10.5 4.9,10.5 0,11.5 4.9,11.5 2.3,11.7 -24,12 -4,12 24,12 4.5,12.4 0,12.5 1.5,12.5 -3.1,13 3.8,13.1 -2.2,13.9 3,13.9 -24,14 24,14 2.2,14.4 0.2,14.5 1.2,14.5 -2.2,15.5 0.2,15.8 -24,16 24,16 -2.5,17 -24,18 24,18 -2.5,18.5 -24,20 -2.5,20 0.5,20 24,20 -2.5,21.5 0.5,21.5 -24,22 24,22 -2.5,23 0.5,23 -24,24 -22,24 -20,24 -18,24 -16,24 -14,24 -12,24 -10,24 -8,24 -6,24 -4,24 0.5,24 4,24 6,24 8,24 10,24 12,24 14,24 16,24 18,24 20,24 22,24 24,24 -2.5,24.1
NetC3_2: C3.2 RFout.5 | length 7
  Top Layer w0.29: C3.2 RFout.5
NetL1_1: L1.1 YP2233W.16 | length 2.2
  Top Layer w0.3: YP2233W.16@-1,1.85 YP2233W.16
  Top Layer w0.35: YP2233W.16 L1.1@-0.975,4.03
RF_IN: C1.2 RFin.5 YP2233W.3 | length 18.2
  Top Layer w0.254: RFin.5@-20,0 RFin.5@-19.723,-0.277 ; YP2233W.3@-1.849,-0.325 YP2233W.3
  Top Layer w0.293: RFin.5 C1.2 YP2233W.3@-1.897,-0.325
RF_OUT: C2.2 C3.1 L2.1 YP2233W.9 | length 8.2
  Top Layer w0.293: 5.2,0 C3.1@12.1,0
  Top Layer w0.35: 4,0.6 L2.1
VCTR: C12.1 pad.21@-3.5,-22.4 YP2233W.5 | length 21.6
  Top Layer w0.35: pad.21@-3.5,-22.4 -3.5,-5 -0.975,-2.475 YP2233W.5
VIN_REF: IC1.3 | length 3.9
  Top Layer w0.35: IC1.3 6.95,-15.05 v3(8,-14)
VREF: C9.2 C11.1 C14.1 IC1.4 pad.21@-0.325,-22.4 YP2233W.6 YP2233W.7 | length 30.2
  Top Layer w0.3: YP2233W.6@-0.35,-1.85 YP2233W.6 ; 0.325,-2.7 0.35,-2.725
  Top Layer w0.35: C9.2 YP2233W.6 ; 0.325,-2.7 YP2233W.7 ; 0.35,-2.725 1,-3.375 C11.1
  Top Layer w0.6: pad.21@-0.5,-22.2 -0.325,-21.825 -0.325,-15 ; C9.2 -0.325,-8.325 ; C11.1 1,-7 -0.325,-8.325 ; IC1.4 -0.275,-15.05 -0.325,-15 ; -0.325,-15 C14.1 -0.325,-8.325
pads on no net: YP2233W.2 YP2233W.14 YP2233W.15 YP2233W.17
copper on no net:
  other v2: -21,-21 21,-21 -21,21 21,21

## Polygon pours and split planes (outlines as drawn)
GND on Top Layer "Top Layer-GND 1" (solid, pour order 24): -24.5,24.5 -24.5,-24.5 -0.375,-24.5 -0.375,-3.025 -1.025,-1.025 -1.025,2.125 -1.025,2.575 -1.025,24.5
GND on Top Layer "Top Layer-GND" (solid, pour order 0): -0.5,24.5 -0.375,-24.5 24.5,-24.5 24.5,24.5
GND on GND "GND-GND" (solid, pour order 28): -25,25 -25,-25 25,-25 25,25
GND on Bottom Layer "Bottom Layer-GND" (solid, pour order 26): -25,25 -25,-25 25,-25 25,25
GND on VCC "VCC-GND" (solid, pour order 30): -25,25 -25,-25 25,-25 25,25

## Other copper
Top Layer:
  region net RF_OUT: 2.2,1.15 2,1.15 2,-1.15 2.2,-1.15 2.5,-0.918 2.5,0.918
  region net RF_OUT: 2.5,0.918 2.5,-0.918 7.5,-0.918 9.5,0 7.5,0.918
  region: 6.7,2.325

## Silkscreen, mask and mechanical layers (free items; w line width, h text height)
Top Overlay:
  lines w0.05: -8.5,0.225 -8.5,0.65
  text "5V" at -3,21.25 h1 r90
  text "GND" at 4.5,20.75 h1 r90
  text "VIN" at 7.1,-12.8 h0.7
  text "Lars Horvath" at 11.175,-18 h1
  text "ADJ" at 7.1,-20 h0.7
  text "VCTR" at -5.5,-23.25 h1 r90
  text "GND" at 5.5,-23.25 h1 r90
Top Solder:
  region: 2.6,-1.25 2.6,-2.075 2.825,-2.5 8.3,-2.5 9.975,-1.775 11.45,-1.775 11.45,-0.5 9.45,-0.5 7.65,-1.25
  region: -15.025,-0.825 -15.025,-2.122 -14.55,-2.65 -2.975,-2.65 -2.575,-2.25 -2.575,-0.825
Mechanical 1:
  the board outline again, w0.1